# EAGLE board Layout (EAGLE 7.7.0)
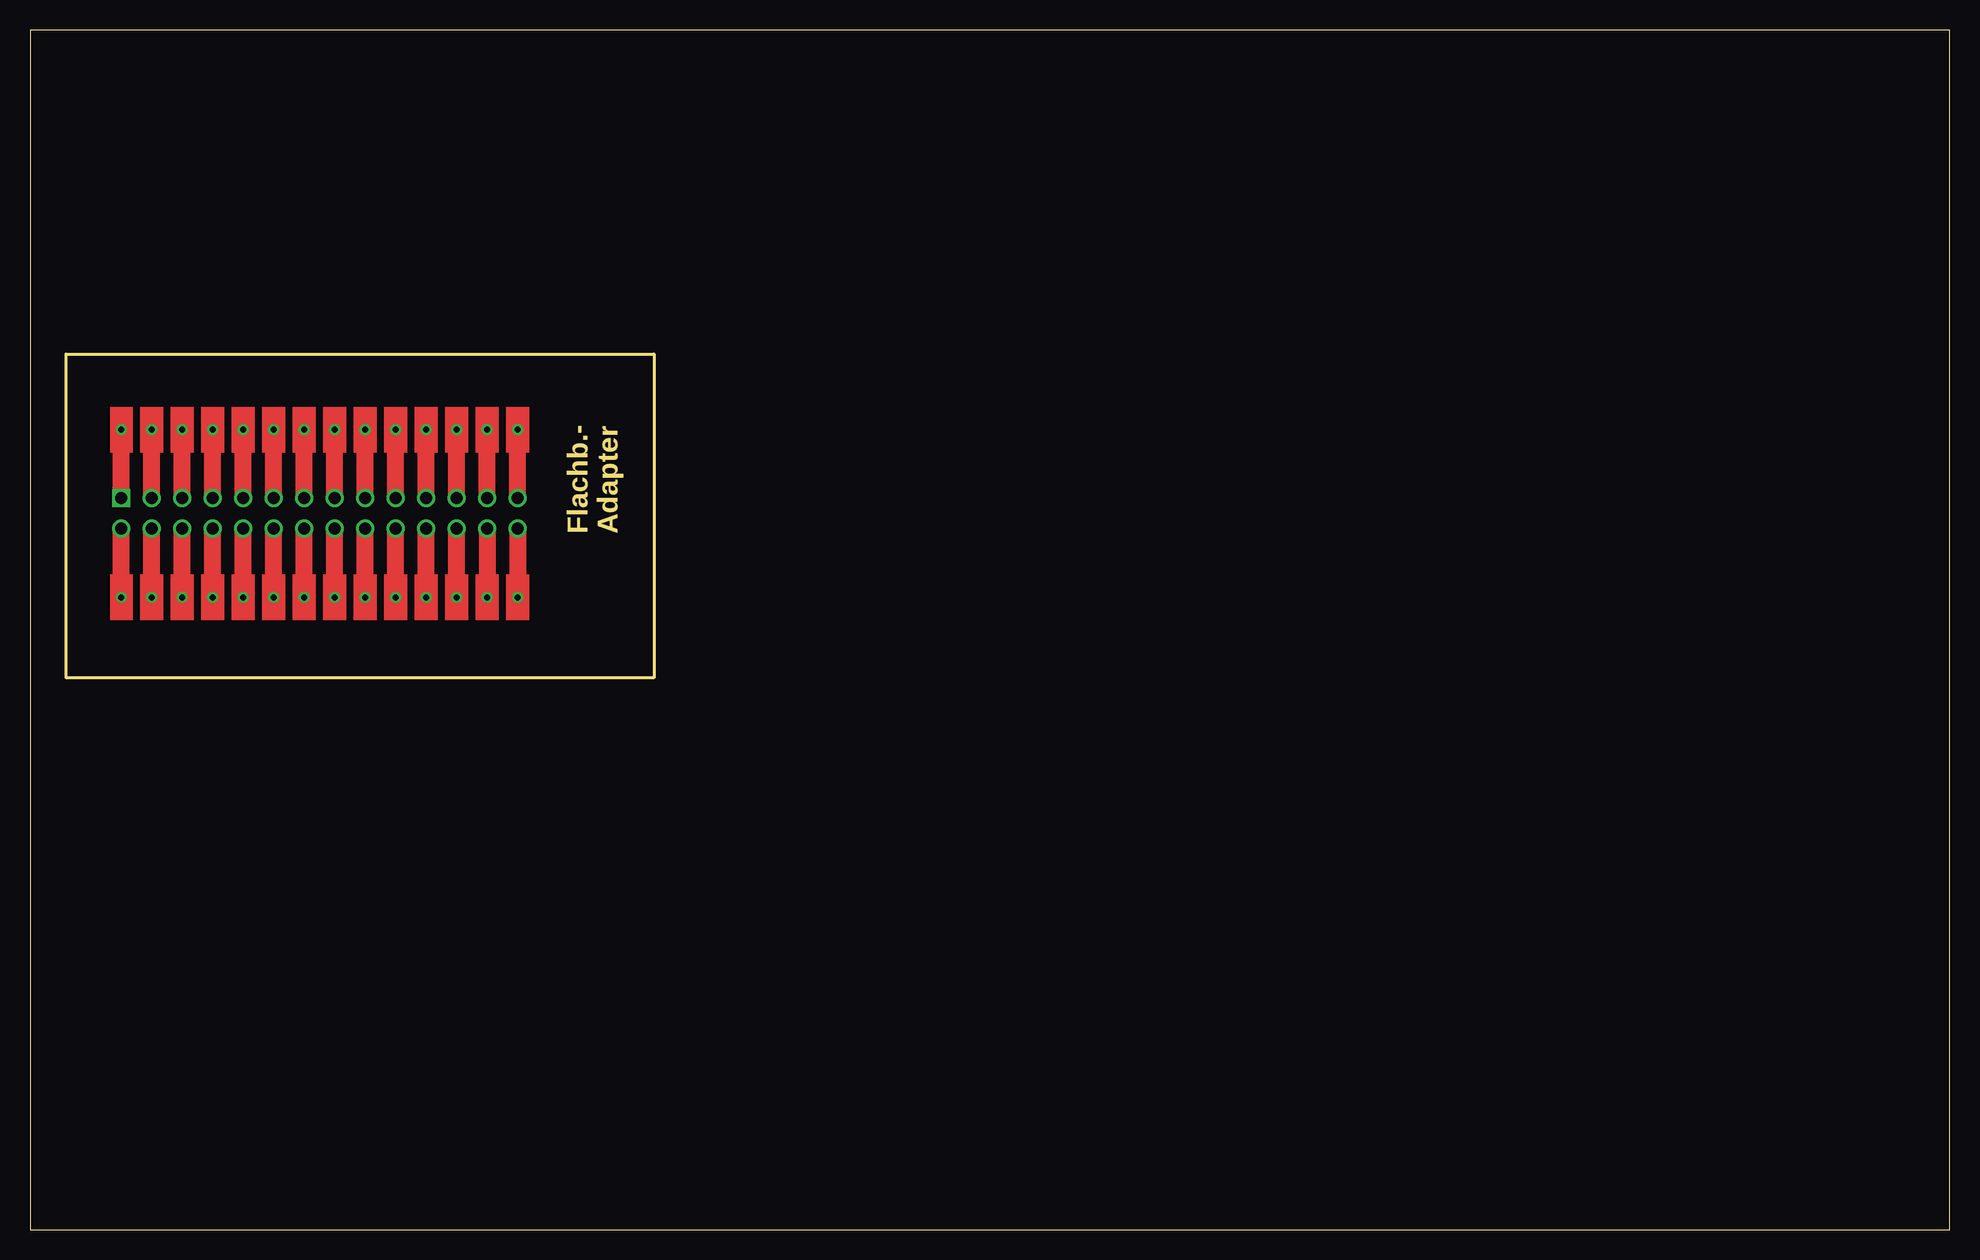
[diagram p0: board, top side]
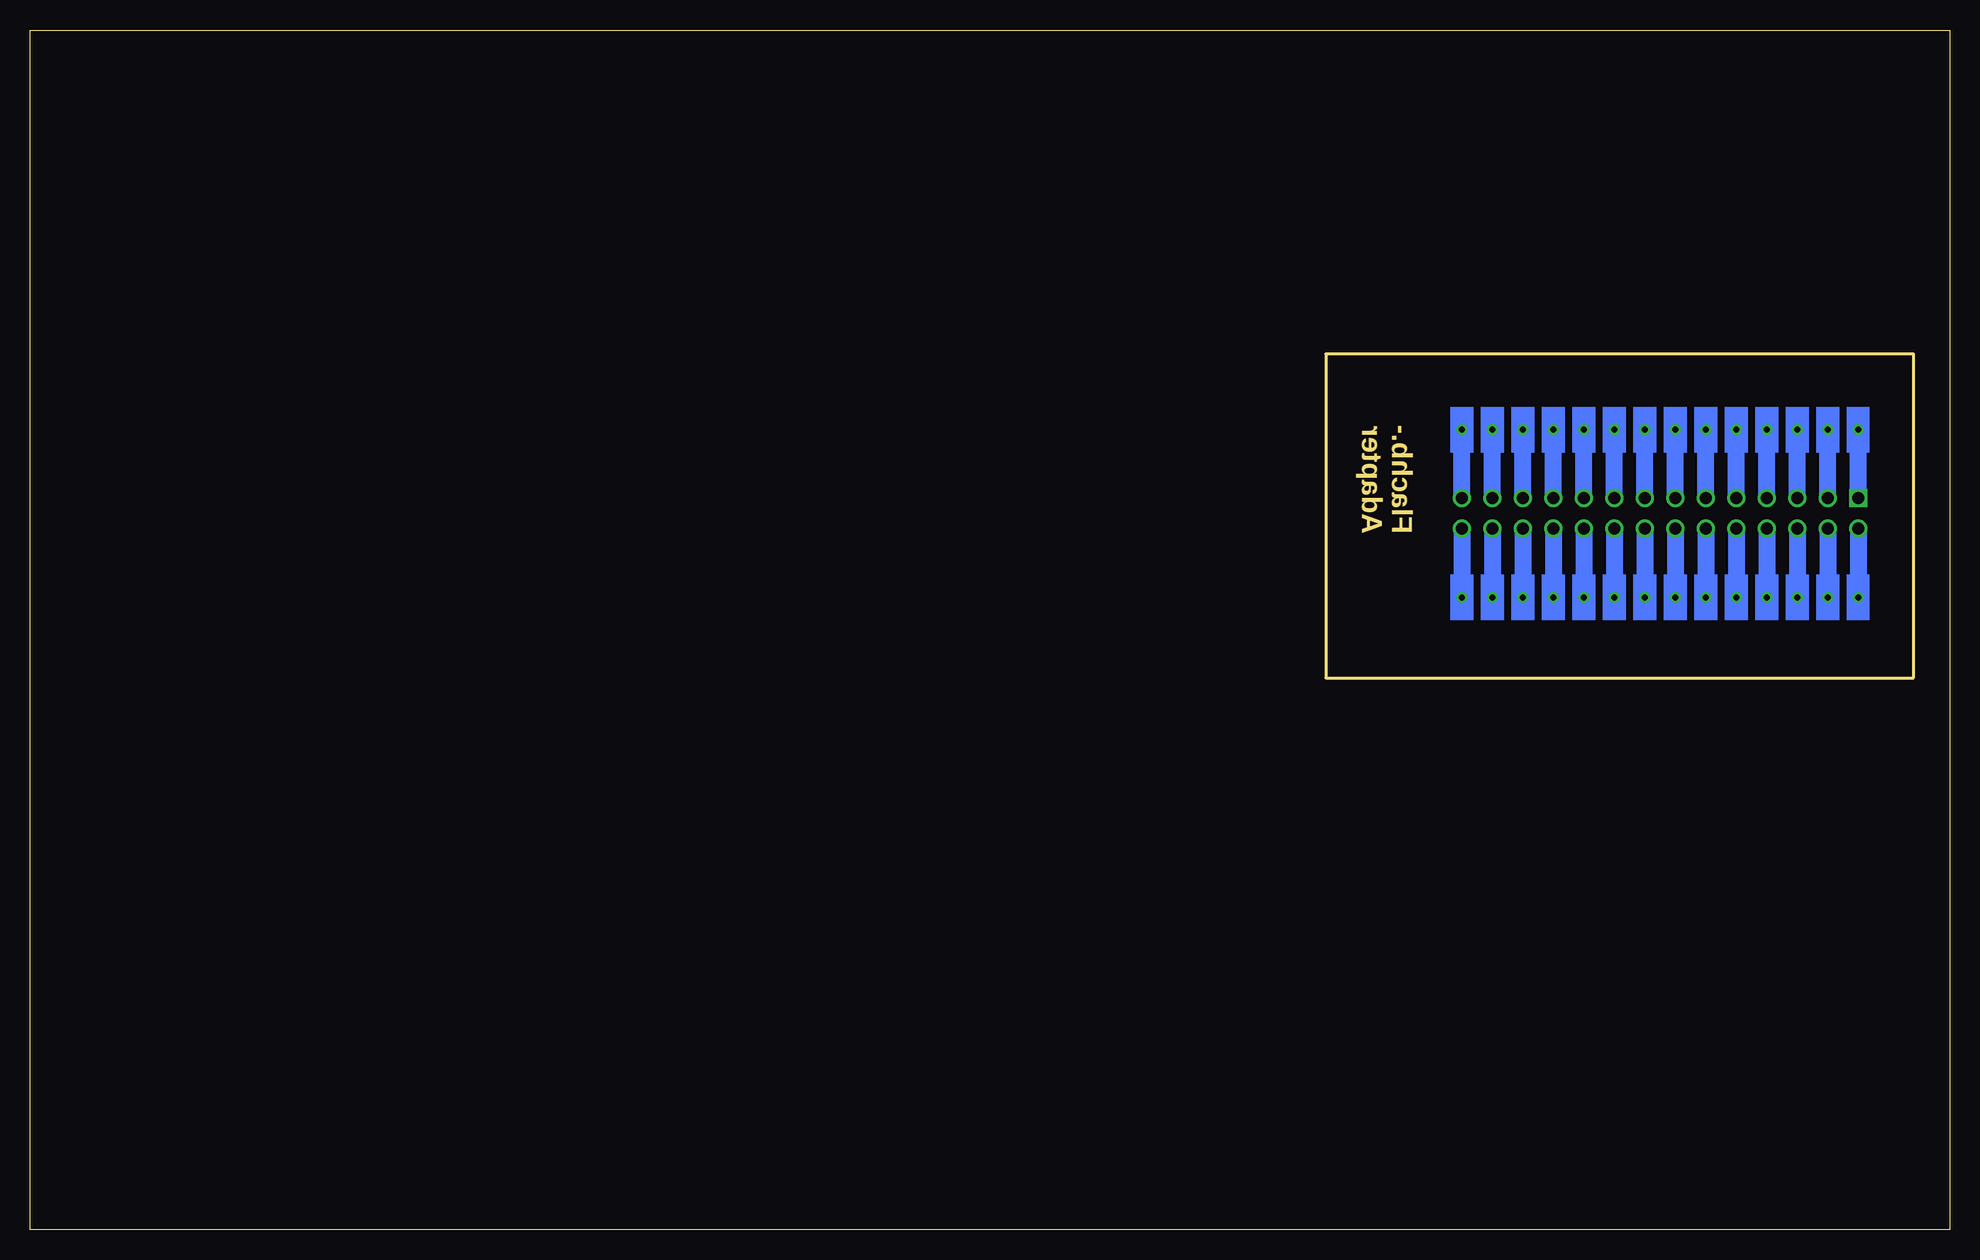
[diagram p1: board, bottom side, seen from below]

Size 160 x 100 mm. Coordinates in mm from the lower left corner, seen from the top.
Outline: 0,0 160,0 160,100 0,100 0,0
Outline: 52,46 3,46 3,73 52,73 52,46
Copper layers (1*16): Top 0.035mm / dielectric 1.5mm / Bottom 0.035mm
Design rules "default": minimum track width 10mil, minimum drill 24mil, track to track 8mil, track to pad 8mil, pad to pad 8mil, via to via 8mil, smd to smd 8mil, copper to edge 40mil, drill to drill 8mil, minimum pad ring 10mil, minimum via ring 8mil, stop-mask expansion 4mil, vias tented up to drill 0mil, thermal gap 10mil

## Placement (x,y rotation side)
U$1  [25X25_BEST]  47.01,51.23 120 top

## Library data of the parts
U$1 = !!!Platinen_Logo!!!

## Tracks (layer width: path | path; a pad name or v marks a point on that pad's centre or on a via)
1  (via drill 0.5, 1)
  Top 1.422: v7.62,60.96 v7.62,66.67
  Bottom 1.422: v7.62,60.96 v7.62,66.67
3  (via drill 0.5, 1)
  Top 1.422: v10.16,60.96 v10.16,66.67
  Bottom 1.422: v10.16,60.96 v10.16,66.67
6  (via drill 0.5, 1)
  Top 1.422: v12.7,52.7 v12.7,58.42
  Bottom 1.422: v12.7,58.42 v12.7,52.7
18  (via drill 0.5, 1)
  Top 1.422: v27.94,52.7 v27.94,58.42
  Bottom 1.422: v27.94,58.42 v27.94,52.7
N$1  (via drill 0.5, 1)
  Top 1.422: v22.86,52.7 v22.86,58.42
  Bottom 1.422: v22.86,58.42 v22.86,52.7
N$2  (via drill 0.5, 1)
  Top 1.422: v7.62,52.7 v7.62,58.42
  Bottom 1.422: v7.62,58.42 v7.62,52.7
N$3  (via drill 0.5, 1)
  Top 1.422: v10.16,52.7 v10.16,58.42
  Bottom 1.422: v10.16,58.42 v10.16,52.7
N$4  (via drill 0.5, 1)
  Top 1.422: v25.4,52.7 v25.4,58.42
  Bottom 1.422: v25.4,58.42 v25.4,52.7
N$5  (via drill 0.5, 1)
  Top 1.422: v15.24,52.7 v15.24,58.42
  Bottom 1.422: v15.24,58.42 v15.24,52.7
N$6  (via drill 0.5, 1)
  Top 1.422: v17.78,52.7 v17.78,58.42
  Bottom 1.422: v17.78,58.42 v17.78,52.7
N$7  (via drill 0.5, 1)
  Top 1.422: v20.32,52.7 v20.32,58.42
  Bottom 1.422: v20.32,58.42 v20.32,52.7
N$10  (via drill 0.5, 1)
  Top 1.422: v30.48,52.7 v30.48,58.42
  Bottom 1.422: v30.48,58.42 v30.48,52.7
N$11  (via drill 0.5, 1)
  Top 1.422: v33.02,52.7 v33.02,58.42
  Bottom 1.422: v33.02,58.42 v33.02,52.7
N$12  (via drill 0.5, 1)
  Top 1.422: v35.56,52.7 v35.56,58.42
  Bottom 1.422: v35.56,58.42 v35.56,52.7
N$13  (via drill 0.5, 1)
  Top 1.422: v38.1,58.42 v38.1,52.7
  Bottom 1.422: v38.1,58.42 v38.1,52.7
N$14  (via drill 0.5, 1)
  Top 1.422: v40.64,58.42 v40.64,52.7
  Bottom 1.422: v40.64,58.42 v40.64,52.7
N$17  (via drill 0.5, 1)
  Top 1.422: v12.7,60.96 v12.7,66.67
  Bottom 1.422: v12.7,60.96 v12.7,66.67
N$18  (via drill 0.5, 1)
  Top 1.422: v15.24,60.96 v15.24,66.67
  Bottom 1.422: v15.24,60.96 v15.24,66.67
N$19  (via drill 0.5, 1)
  Top 1.422: v17.78,60.96 v17.78,66.67
  Bottom 1.422: v17.78,60.96 v17.78,66.67
N$20  (via drill 0.5, 1)
  Top 1.422: v20.32,60.96 v20.32,66.67
  Bottom 1.422: v20.32,60.96 v20.32,66.67
N$21  (via drill 0.5, 1)
  Top 1.422: v22.86,60.96 v22.86,66.67
  Bottom 1.422: v22.86,60.96 v22.86,66.67
N$22  (via drill 0.5, 1)
  Top 1.422: v25.4,60.96 v25.4,66.67
  Bottom 1.422: v25.4,60.96 v25.4,66.67
N$23  (via drill 0.5, 1)
  Top 1.422: v27.94,60.96 v27.94,66.67
  Bottom 1.422: v27.94,60.96 v27.94,66.67
N$24  (via drill 0.5, 1)
  Top 1.422: v30.48,60.96 v30.48,66.67
  Bottom 1.422: v30.48,60.96 v30.48,66.67
N$25  (via drill 0.5, 1)
  Top 1.422: v33.02,60.96 v33.02,66.67
  Bottom 1.422: v33.02,60.96 v33.02,66.67
N$26  (via drill 0.5, 1)
  Top 1.422: v35.56,60.96 v35.56,66.67
  Bottom 1.422: v35.56,60.96 v35.56,66.67
N$27  (via drill 0.5, 1)
  Top 1.422: v38.1,60.96 v38.1,66.67
  Bottom 1.422: v38.1,60.96 v38.1,66.67
N$28  (via drill 0.5, 1)
  Top 1.422: v40.64,60.96 40.64,66.99
  Bottom 1.422: v40.64,60.96 v40.64,66.67
(copper drawn outside any net)
  shapes: Bottom area x28, Top area x28

## Text on the board
Dimension: Flachb.- / Adapter
Bestückungsdruck: 1 | 3 | 5 | 7 | 9 | 11 | 13 | 15 | 17 | 19 | 21 | 23 | 25 | 27 | 2 | 4 | 6 | 8 | 10 | 12 | 14 | 16 | 18 | 20 | 22 | 24 | 26 | 28